# Altium PCB WF_AutoCar.PcbDoc (part 1 of 2)
Units mil, origin at the board's own origin, x right, y up, seen from the top; angles counter-clockwise.
Board outline 2600 x 3475 mil, 4 copper layers (Top Layer, InternalPlane1, POWER, Bottom Layer); 97 components, 133 nets, 458 pads, 431 vias.
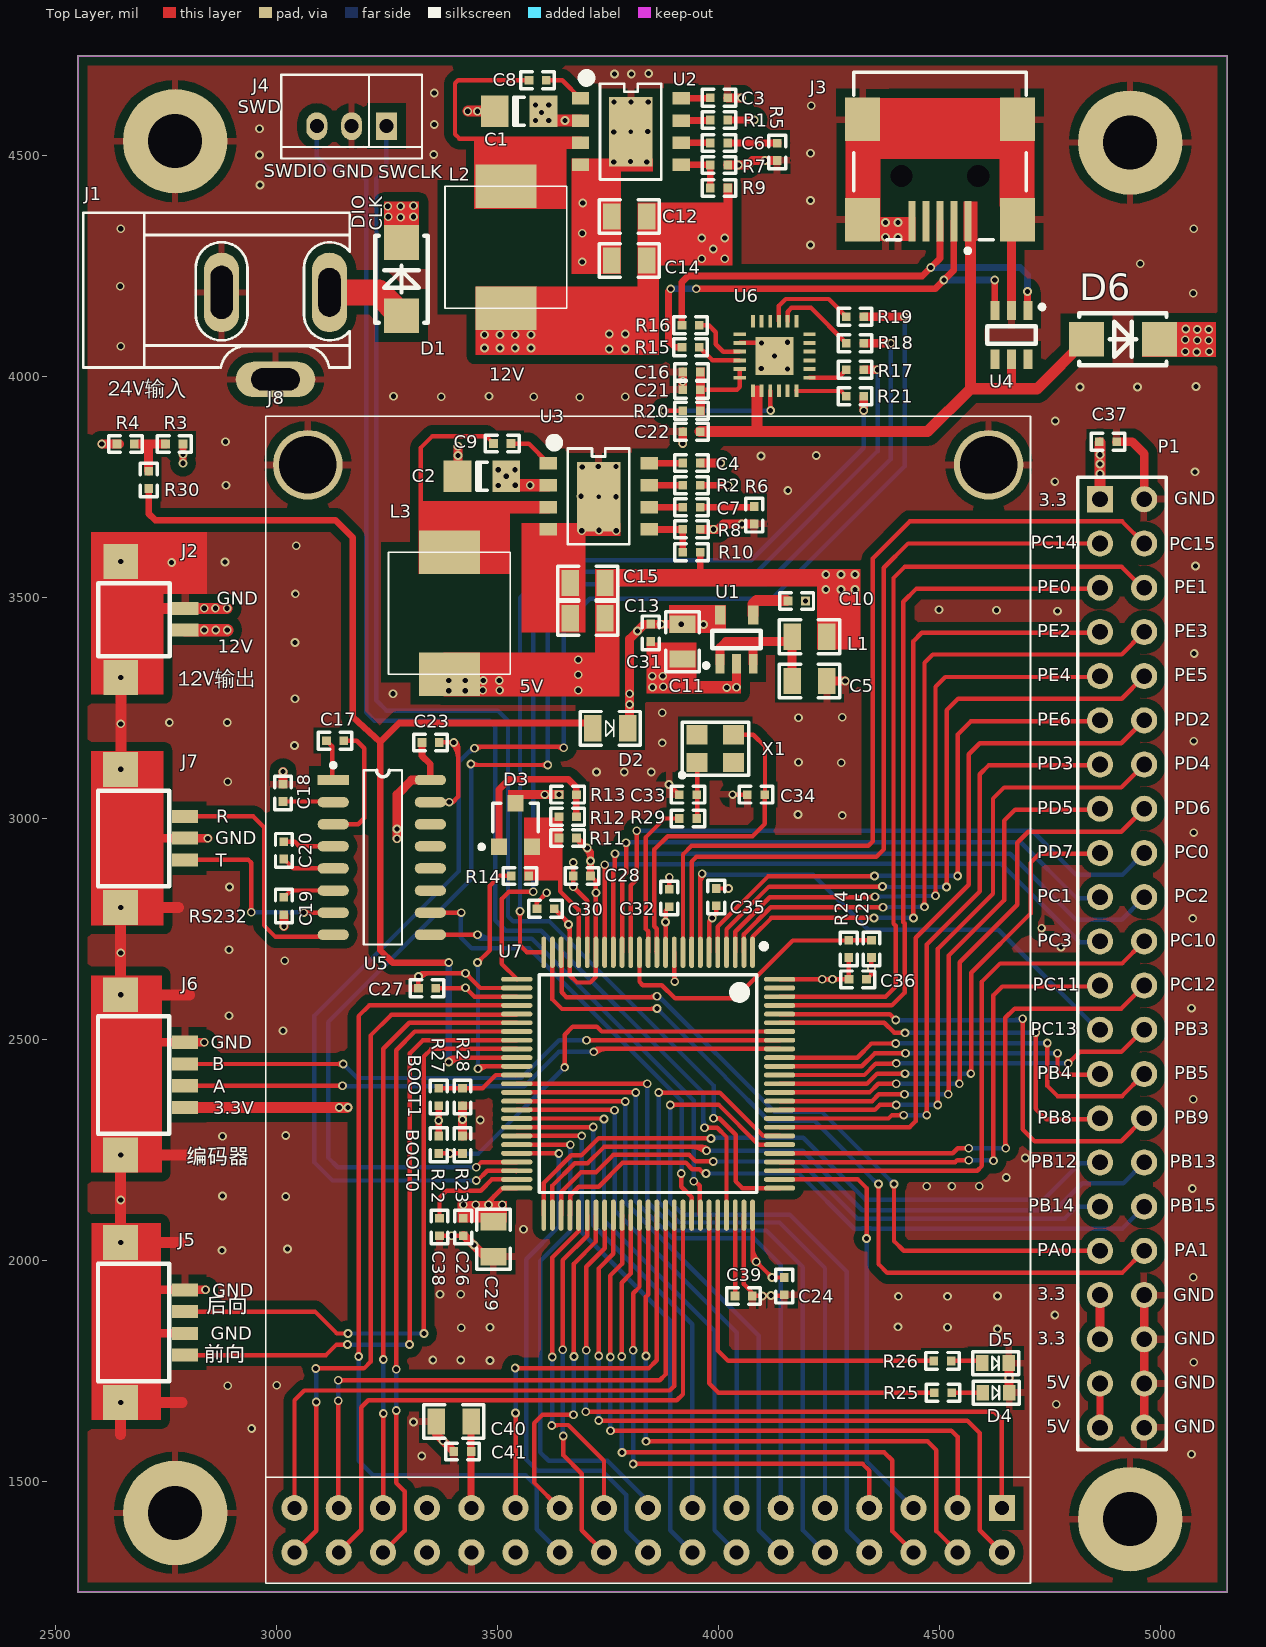
[diagram p0: Top Layer view]
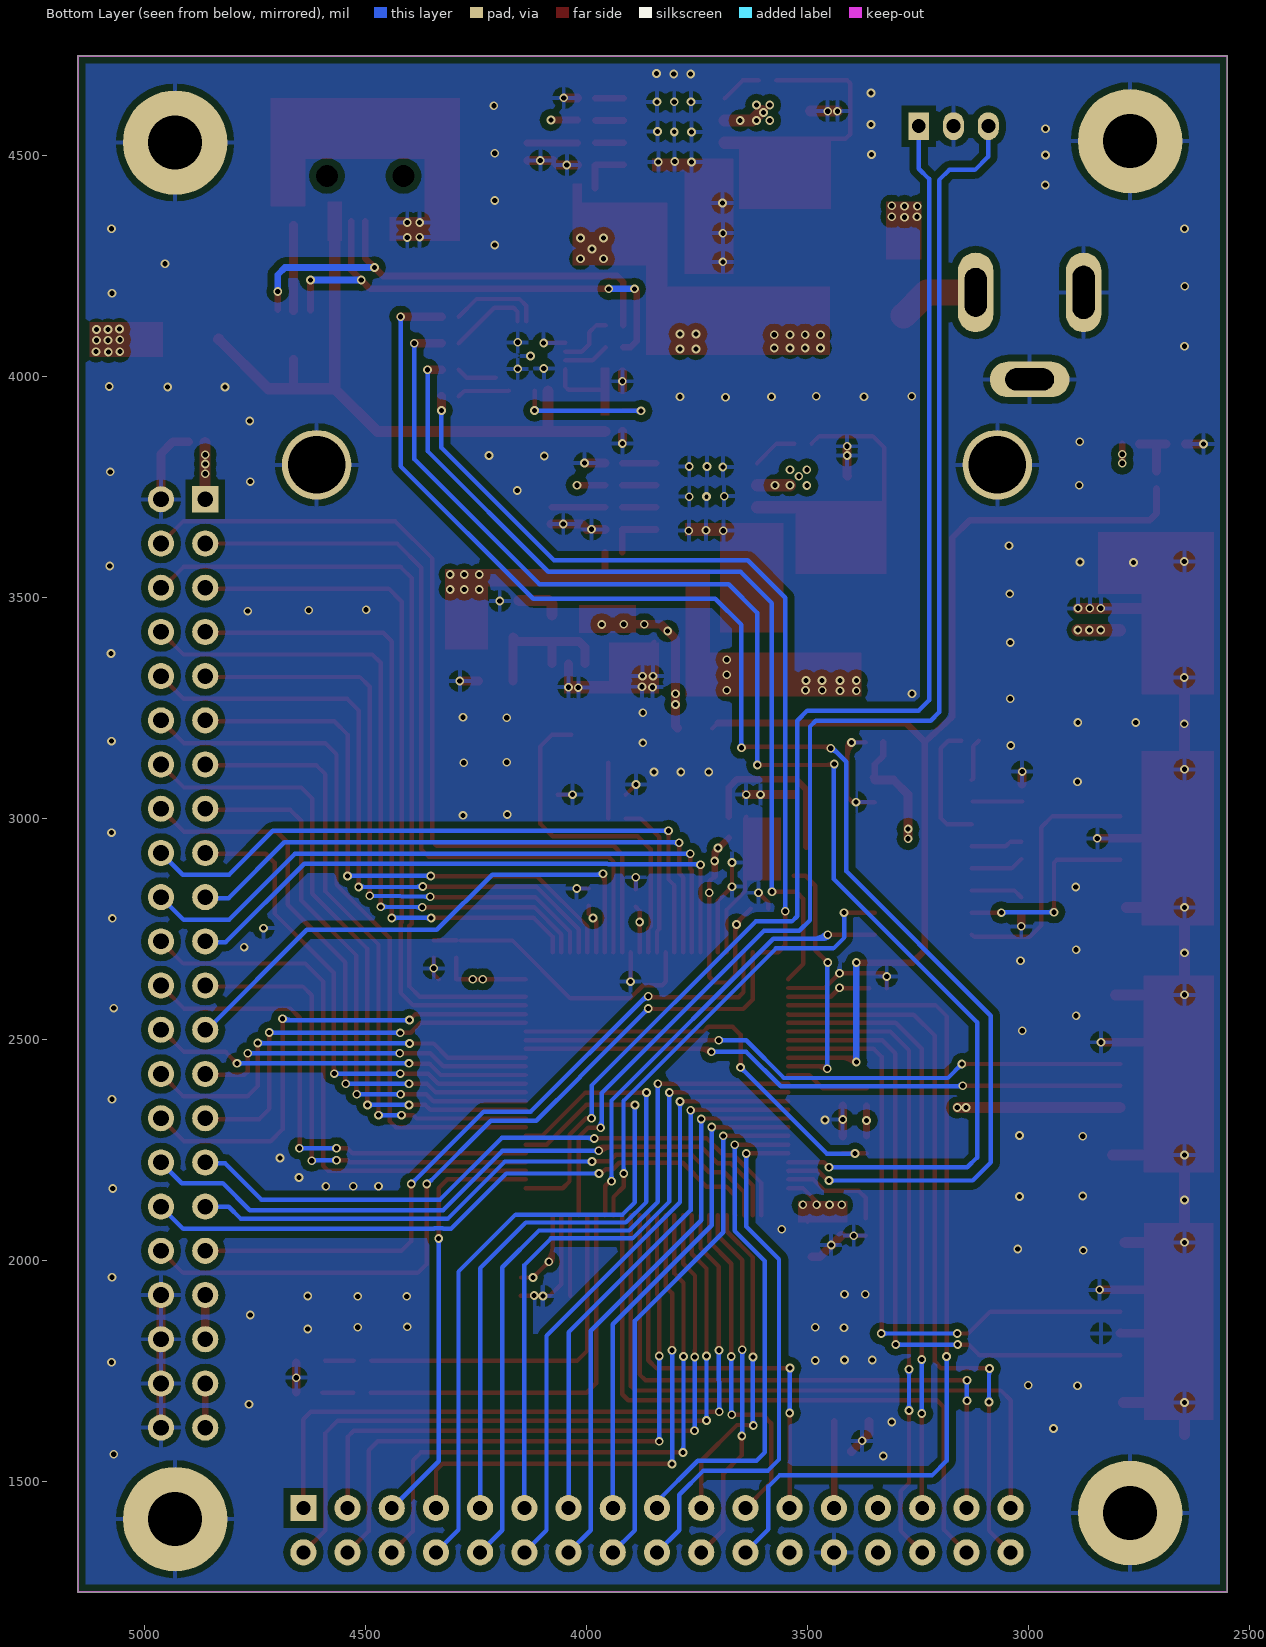
[diagram p1: Bottom Layer view, seen from below]
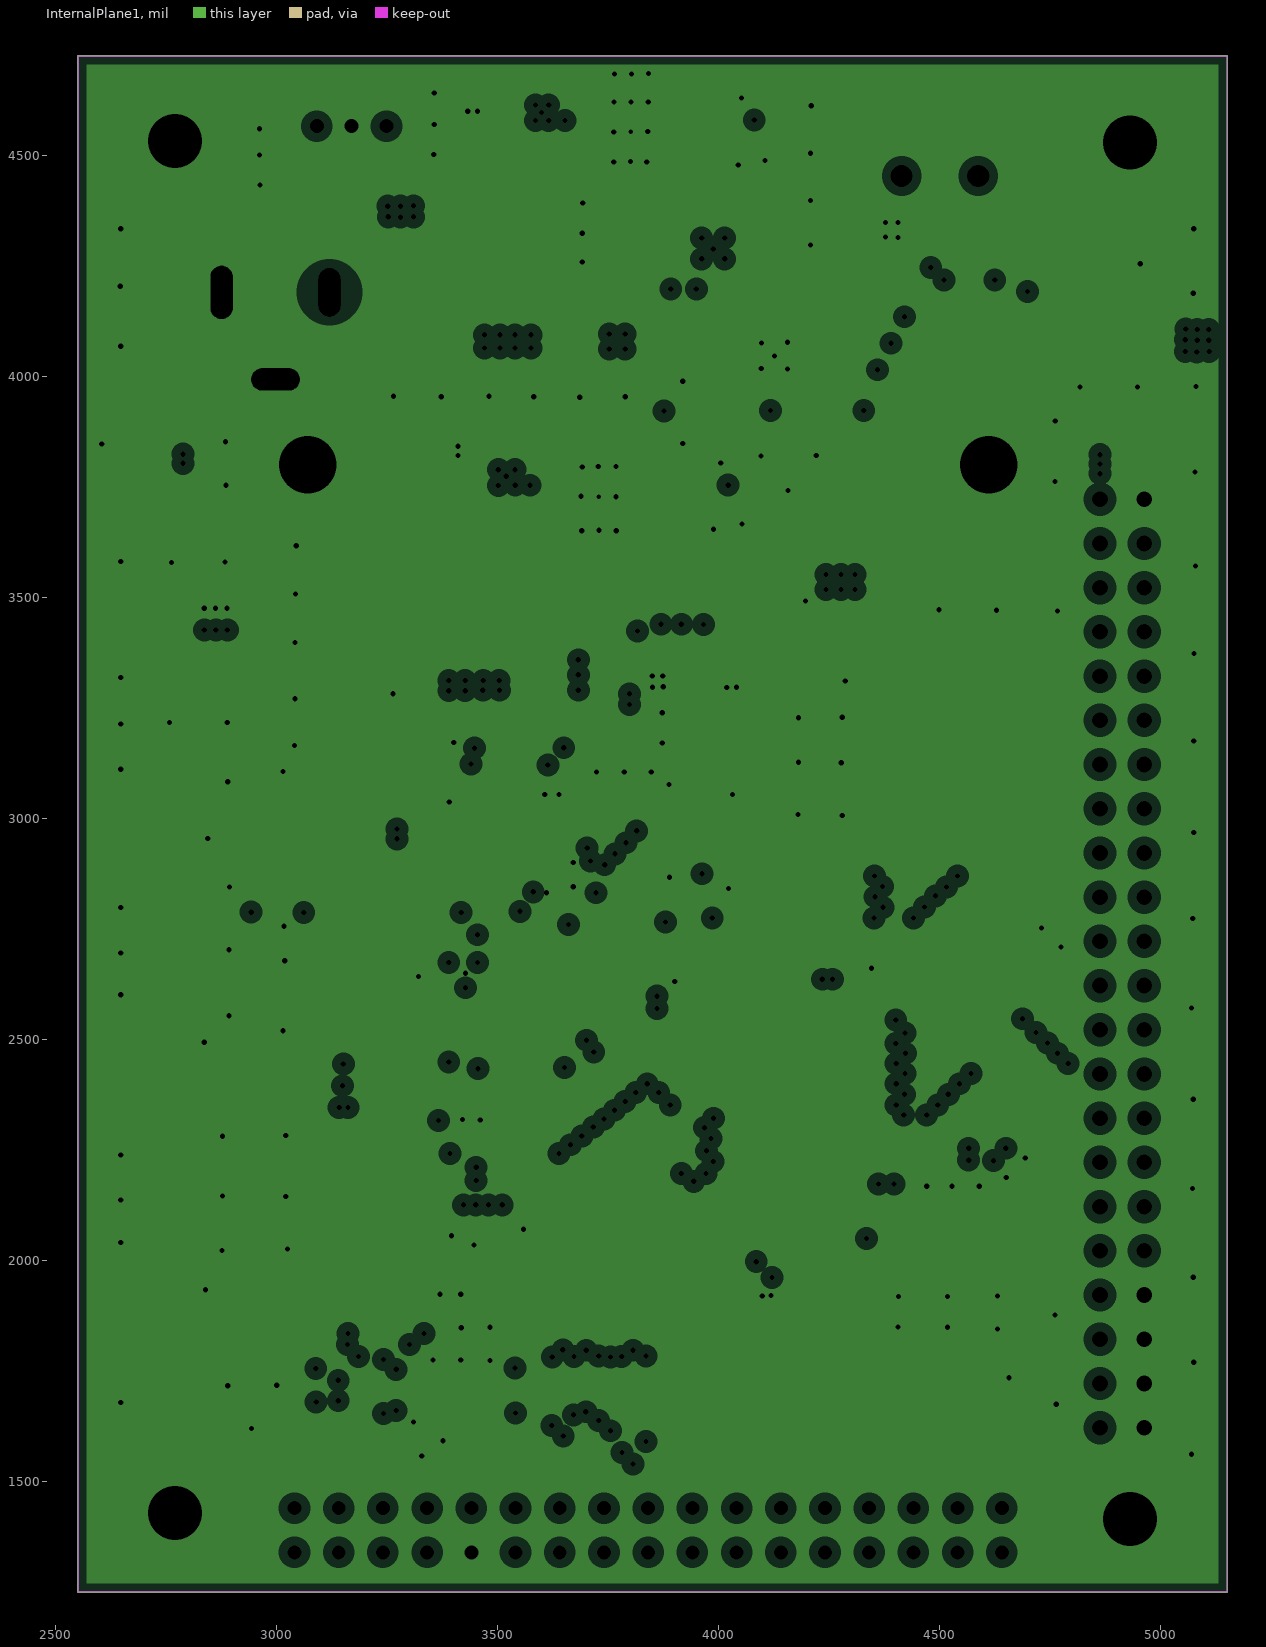
[diagram p2: InternalPlane1, clearances drawn from the general rule]
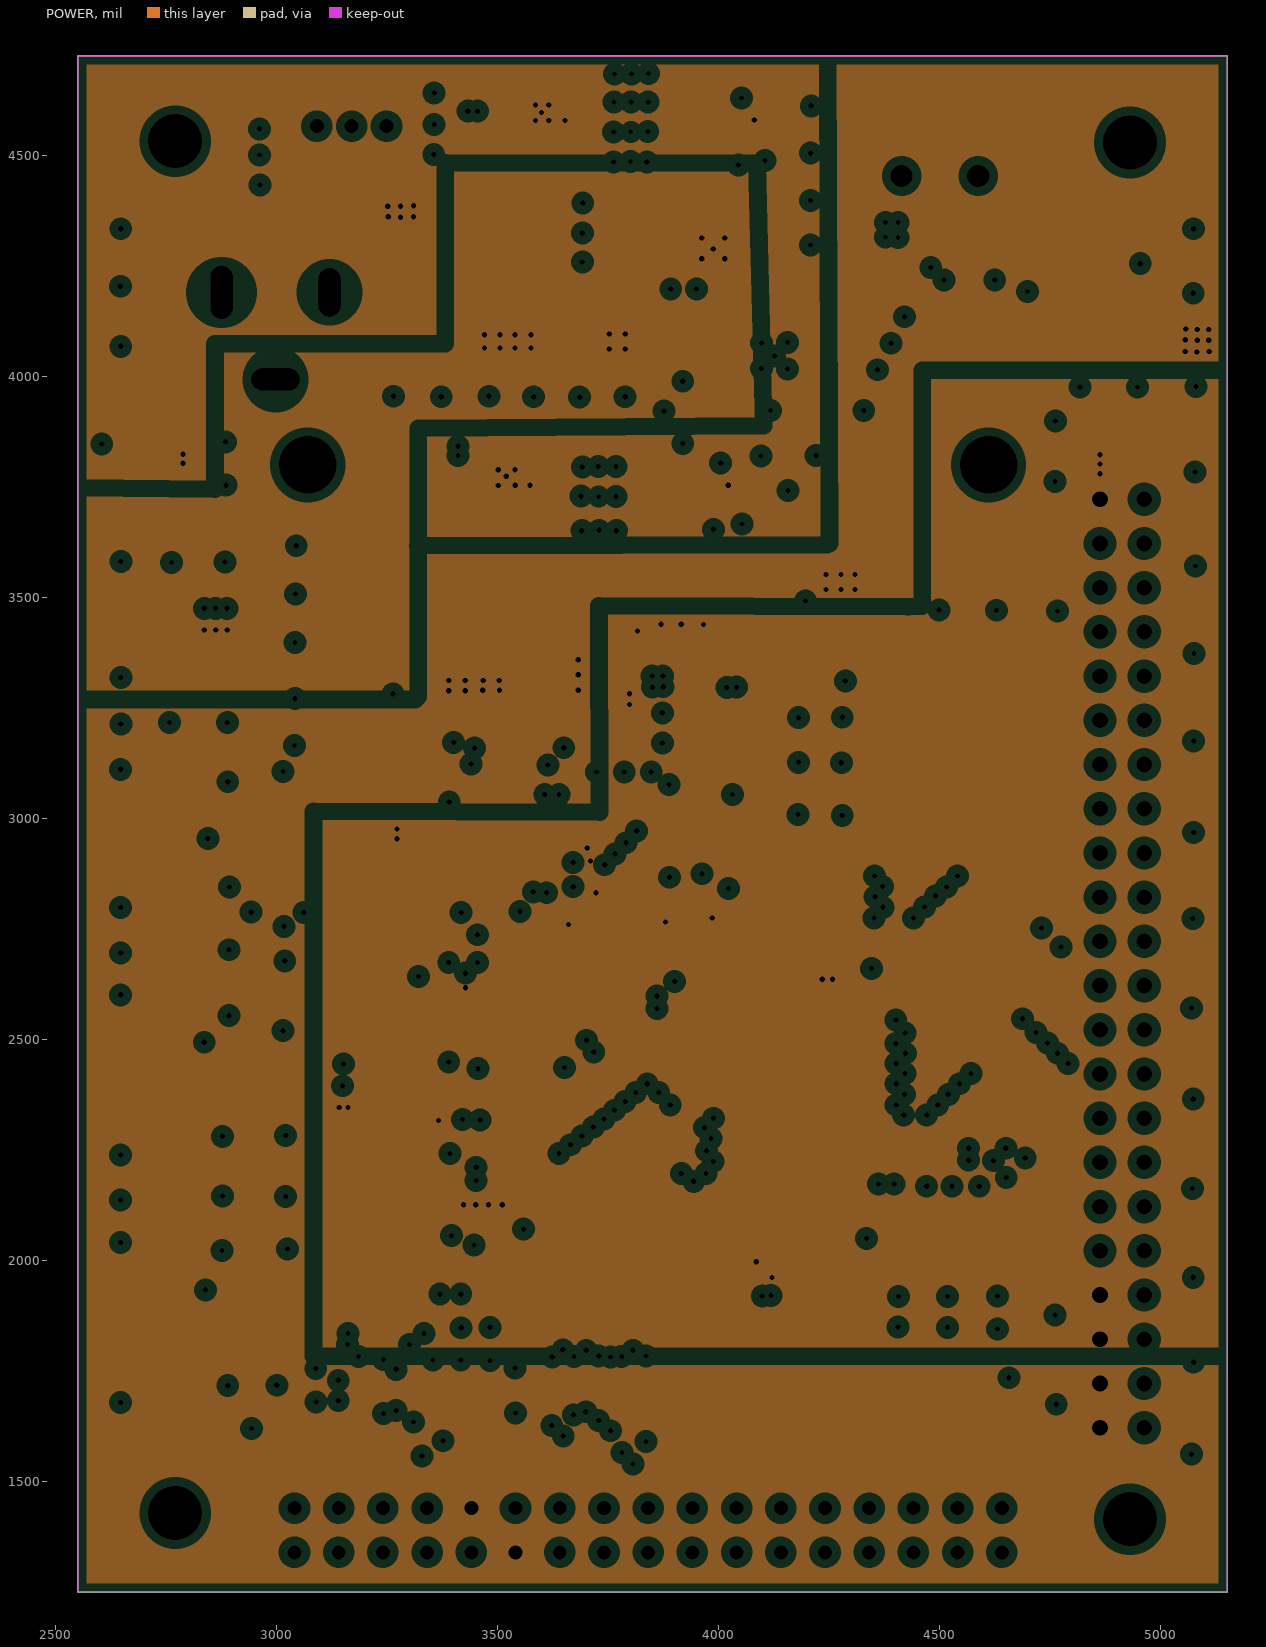
[diagram p3: POWER, clearances drawn from the general rule]

## Layer stack, top to bottom
Top Layer: signal copper 1.4
Dielectric: core 12.6, FR-4, Dk 4.8
InternalPlane1: plane copper 1.4, net GND
Dielectric: prepreg 12.6, FR-4, Dk 4.8
POWER: plane copper 1.4, net (Multiple Nets)
Dielectric: core 12.6, FR-4, Dk 4.8
Bottom Layer: signal copper 1.4

## Board outline
2550,1250 5150,1250 5150,4725 2550,4725

## Design rules (kind name [scope] priority, off if disabled: settings)
Clearance [All] p1: gap=10
PlaneClearance [All] p1: clearance=20
PlaneConnect [All] p1: planeconnectstyle=Relief reliefexpansion=20 reliefentries=4 reliefconductorwidth=15 reliefairgap=10
PolygonConnect [All] p1: connectstyle=Relief reliefconductorwidth=15 reliefentries=4 polygonreliefangle="90 Angle"
RoutingVias [All] p1: holewidth=28 width=50 viastyle="Through Hole" minholewidth=28 minwidth=50 maxholewidth=28 maxwidth=50
SilkscreenOverComponentPads [All] p1: minsilkscreentomaskgap=10
SolderMaskExpansion [All] p1: expansion=4
TestPointUsage [All] p1: valid=0 allowmultiple=FALSE
Testpoint [All] p1: side=15 testpointundercomponent=TRUE minsize=40 maxsize=100 preferedsize=60 minholesize=0 maxholesize=40 preferedholesize=32 testpointgrid=1 style=1023 order=0-112345678
Width [All] p1: maxlimit=100 minlimit=10 preferedwidth=10
21 further rules are at their usual default settings.

## Components (designator, comment, footprint, x,y, rotation, side; value= is the part's Value field where it differs from the comment)
C1 "Cap1" C1206 3548,4600 r0 top
C2 "Cap1" C1206 3464,3774 r0 top
C3 "Cap1" C0402 4000,4630 r180 top
C4 "Cap1" C0402 3938,3804 r180 top
C5 "Cap1" CC0805 4205,3311 r180 top
C6 "Cap1" C0402 4000,4528 r180 top
C7 "Cap1" C0402 3938,3704 r180 top
C8 "Cap1" C0402 3590,4670 r180 top
C9 "Cap1" C0402 3510,3848 r180 top
C10 "Cap1" C0402 4176,3492 r180 top
C11 "Cap1" CC0805 3918,3400 r90 top
C12 "Cap1" CC0805 3797,4362 r0 top
C13 "Cap1" CC0805 3703,3453 r0 top
C14 "Cap1" CC0805 3797,4262 r0 top
C15 "Cap1" CC0805 3703,3533 r0 top
C16 "Cap1" C0402 3938,4010 r0 top
C17 "Cap1" C0402 3132,3176 r0 top
C18 "Cap1" C0402 3014,3058 r270 top
C19 "Cap1" C0402 3016,2802 r90 top
C20 "Cap1" C0402 3016,2928 r270 top
C21 "Cap1" C0402 3938,3970 r0 top
C22 "Cap1" C0402 3938,3875 r0 top
C23 "Cap1" C0402 3348,3172 r0 top
C24 "Cap1" C0402 4148,1942 r90 top
C25 "Cap1" C0402 4345,2705 r90 top
C26 "Cap1" C0402 3422,2076 r90 top
C27 "Cap1" C0402 3340,2616 r0 top
C28 "Cap1" C0402 3690,2870 r0 top
C29 "Cap1" CC0805 3490,2048 r90 top
C30 "Cap1" C0402 3608,2796 r0 top
C31 "Cap1" C0402 3846,3420 r90 top
C32 "Cap1" C0402 3888,2820 r270 top
C33 "Cap1" C0402 3930,3054 r180 top
C34 "Cap1" C0402 4084,3054 r180 top
C35 "Cap1" C0402 3994,2822 r270 top
C36 "Cap1" C0402 4314,2636 r180 top
C37 "Cap1" C0402 4880,3852 r180 top
C38 "Cap1" C0402 3368,2076 r90 top
C39 "Cap1" C0402 4056,1920 r0 top
C40 "Cap1" CC0805 3400,1636 r0 top
C41 "Cap1" C0402 3420,1568 r0 top
D1 "SS34" LC-SMA(DO-214AC)_S2 3282,4220 r270 top
D2 "1N4148/0603" Diode-0805 3754,3204 r0 top
D3 "TL431" SOT-23 3540,2985 r0 top
D4 "LED0" DIODE-12 4627,1701 r0 top
D5 "LED1" DIODE-12 4626,1768 r0 top
D6 "M7" LC-SMA(DO-214AC)_S2 4914,4084 r180 top
J1 "DC-005" DC10B 2700,4020 r0 top
J2 "MH1.25*2卧式贴片" MH1.25*2立式表贴 2720,3500 r270 top
J3 "USB-PORT" USB/SM0.8-6H5 4500,4660 r90 top
J4 "2.0*3" Con3_2.0 3248,4566 r180 top
J5 "MH1.25*4卧式 前向开关 后向开关" MH1.25*4立式表贴 2719.57,1860 r270 top
J6 "MH1.25*4卧式 编码器接口" MH1.25*4立式表贴 2719.57,2420 r270 top
J7 "MH1.25*3卧式贴片 RS232" MH1.25*3立式表贴 2719.57,2980 r270 top
J8 "LCD2.2" 2.2TFT_ILI9325 4640,1440 r0 top
L1 "BLM18" CC0805 4205,3411 r180 top
L2 "Inductor" 0630 3656,4430 r270 top
L3 "Inductor" 0630 3528,3602 r270 top
P1 "Header 22X2" HDR2X22 4862,3722 r270 top
R1 "Res1" C0402 4000,4580 r0 top
R2 "Res1" C0402 3938,3754 r0 top
R3 "Res1" C0402 2768,3847 r0 top
R4 "Res1" C0402 2658,3847 r0 top
R5 "Res1" C0402 4132,4508 r270 top
R6 "Res1" C0402 4080,3686 r270 top
R7 "Res1" C0402 4000,4478 r180 top
R8 "Res1" C0402 3938,3654 r180 top
R9 "Res1" C0402 4000,4426 r0 top
R10 "Res1" C0402 3938,3602 r0 top
R11 "Res1" C0402 3658,2956 r0 top
R12 "Res1" C0402 3658,3004 r0 top
R13 "Res1" C0402 3658,3054 r180 top
R14 "Res1" C0402 3550,2870 r0 top
R15 "Res1" C0402 3936,4066 r0 top
R16 "Res1" C0402 3936,4116 r0 top
R17 "Res1" C0402 4308,4015 r0 top
R18 "Res1" C0402 4308,4075 r0 top
R19 "Res1" C0402 4308,4135 r0 top
R20 "Res1" C0402 3938,3922 r0 top
R21 "Res1" C0402 4308,3955 r0 top
R22 "Res1" C0402 3366,2262 r90 top
R23 "Res1" C0402 3420,2262 r270 top
R24 "Res1" C0402 4294,2705 r90 top
R25 "Res1" C0402 4507,1701 r0 top
R26 "Res1" C0402 4506,1773 r0 top
R27 "Res1" C0402 3366,2370 r270 top
R28 "Res1" C0402 3420,2370 r90 top
R29 "Res1" C0402 3930,3000 r0 top
R30 "Res1" C0402 2710,3766 r270 top
U1 "SP6205EM5-L-3-3" LC-SOT-23-5 4040,3405 r270 top
U2 "MP2303" LC-SOIC-8_150mil 3801,4553 r0 top
U3 "MP2303" LC-SOIC-8_150mil 3728,3728 r0 top
U4 "SRV05-4.TCT" LC-SOT-23-6 4662,4094 r90 top
U5 "MAX3232" SOP16M 3240,2917 r270 top
U6 "CP2105" QFN-24 4063,4115 r0 top
U7 "STM32F207VET6" LC-LQFP-100_14x14x05P 3840,2400 r180 top
X1 "12M" XTAL-3225 3992,3158 r180 top

## Footprints (in the part's own frame and the unit in brackets; to place one, negate y for a bottom-side part, rotate by r counter-clockwise, add the part's x,y. Pads: shape width x height; smd on the part's side, far side on the other; paste and mask are expansions set on the pad)
2.2TFT_ILI9325 [mm]
  rect 1.5x1.5 hole 0.8: 1(0,0)
  round 1.5 hole 0.8: 2(0,-2.54) 3(-2.54,0) 4(-2.54,-2.54) 5(-5.08,0) 6(-5.08,-2.54) 7(-7.62,0) 8(-7.62,-2.54) 9(-10.16,0) 10(-10.16,-2.54) 11(-12.7,0) 12(-12.7,-2.54) 13(-15.24,0) 14(-15.24,-2.54) 15(-17.78,0) 16(-17.78,-2.54) 17(-20.32,0) 18(-20.32,-2.54) 19(-22.86,0) 20(-22.86,-2.54) 21(-25.4,0) 22(-25.4,-2.54) 23(-27.94,0) 24(-27.94,-2.54) 25(-30.48,0) 26(-30.48,-2.54) 27(-33.02,0) 28(-33.02,-2.54) 29(-35.56,0) 30(-35.56,-2.54) 31(-38.1,0) 32(-38.1,-2.54) 33(-40.64,0) 34(-40.64,-2.54)
  round 4 hole 3.3: 35(-39.878,59.944) 36(-0.762,59.944)
  silkscreen extent -42.29,-4.32 1.65,62.74
0630 [mm] "7*7*3mm"
  rect 2.5x3.5 smd: 1(0,-3.5) 2(7,-3.5)
  silkscreen extent 0,-7 7,0
C0402 [mm]
  rect 0.5x0.5 smd: 1(-0.5,0) 2(0.5,0)
  silkscreen extent -0.97,-0.48 0.97,0.48, body extent -0.74,-0.25 0.74,0.25, height 0.5
C1206 [mm] "Chip Capacitor; Body 3.2 x 1.6 mm (LxW typ)"
  rect 1.6x1.8 smd: 1(-1.4,0) 2(1.4,0)
  silkscreen extent -0.3,-0.8 0.3,0.8
CC0805 [mm]
  rect 1x1.5 smd: 1(-1,0) 2(1,0)
  silkscreen extent -1.73,-0.97 1.73,0.97, body extent -1.37,-0.79 1.37,0.79, height 1.25
Con3_2.0 [mm]
  rect 1.2x1.6 hole 0.8: 1(0,0)
  oval 1.2x1.6 hole 0.8: 2(2,0) 3(4,0)
  silkscreen extent -2.05,-2.95 6.05,1.85, body extent -2.05,-2.95 6.05,1.85, height 6
DC10B [mil]
  oval 80x180 hole 50 slot 110 at 90 deg: 1(419.09,170)
  oval 80x180 hole 50 slot 120 at 90 deg: 2(175,170)
  oval 180x80 hole 50 slot 110 at 0 deg: 3(297.05,-26.85)
  silkscreen extent -138,0 465,350
DIODE-12 [mil]
  rect 28.04x36 smd: 1(-30,0)
  rect 28.03x36 smd: 2(30,0)
  silkscreen extent -52,-26 52,26, body extent -44,-18 44,18, height 30
Diode-0805 [mm]
  rect 1x1.5 smd: 1(-1,0) 2(1,0)
  silkscreen extent -1.73,-0.97 1.73,0.97, body extent -1.37,-0.79 1.37,0.79, height 1.25
HDR2X22 [mm] "Connector; Header; 22x2 Position"
  rect 1.5x1.5 hole 0.9: 1(0,0)
  round 1.5 hole 0.9: 2(0,2.54) 3(2.54,0) 4(2.54,2.54) 5(5.08,0) 6(5.08,2.54) 7(7.62,0) 8(7.62,2.54) 9(10.16,0) 10(10.16,2.54) 11(12.7,0) 12(12.7,2.54) 13(15.24,0) 14(15.24,2.54) 15(17.78,0) 16(17.78,2.54) 17(20.32,0) 18(20.32,2.54) 19(22.86,0) 20(22.86,2.54) 21(25.4,0) 22(25.4,2.54) 23(27.94,0) 24(27.94,2.54) 25(30.48,0) 26(30.48,2.54) 27(33.02,0) 28(33.02,2.54) 29(35.56,0) 30(35.56,2.54) 31(38.1,0) 32(38.1,2.54) 33(40.64,0) 34(40.64,2.54) 35(43.18,0) 36(43.18,2.54) 37(45.72,0) 38(45.72,2.54) 39(48.26,0) 40(48.26,2.54) 41(50.8,0) 42(50.8,2.54) 43(53.34,0) 44(53.34,2.54)
  silkscreen extent -1.27,-1.27 54.61,3.81
LC-LQFP-100_14x14x05P [mm]
  oval 0.28x1.8 smd mask+0.051: 1(-6,-7.55) 2(-5.5,-7.55) 3(-5,-7.55) 4(-4.5,-7.55) 5(-4,-7.55) 6(-3.5,-7.55) 7(-3,-7.55) 8(-2.5,-7.55) 9(-2,-7.55) 10(-1.5,-7.55) 11(-1,-7.55) 12(-0.5,-7.55) 13(0,-7.55) 14(0.5,-7.55) 15(1,-7.55) 16(1.5,-7.55) 17(2,-7.55) 18(2.5,-7.55) 19(3,-7.55) 20(3.5,-7.55) 21(4,-7.55) 22(4.5,-7.55) 23(5,-7.55) 24(5.5,-7.55) 25(6,-7.55) 51(6,7.55) 52(5.5,7.55) 53(5,7.55) 54(4.5,7.55) 55(4,7.55) 56(3.5,7.55) 57(3,7.55) 58(2.5,7.55) 59(2,7.55) 60(1.5,7.55) 61(1,7.55) 62(0.5,7.55) 63(0,7.55) 64(-0.5,7.55) 65(-1,7.55) 66(-1.5,7.55) 67(-2,7.55) 68(-2.5,7.55) 69(-3,7.55) 70(-3.5,7.55) 71(-4,7.55) 72(-4.5,7.55) 73(-5,7.55) 74(-5.5,7.55) 75(-6,7.55)
  oval 1.8x0.28 smd mask+0.051: 26(7.55,-6) 27(7.55,-5.5) 28(7.55,-5) 29(7.55,-4.5) 30(7.55,-4) 31(7.55,-3.5) 32(7.55,-3) 33(7.55,-2.5) 34(7.55,-2) 35(7.55,-1.5) 36(7.55,-1) 37(7.55,-0.5) 38(7.55,0) 39(7.55,0.5) 40(7.55,1) 41(7.55,1.5) 42(7.55,2) 43(7.55,2.5) 44(7.55,3) 45(7.55,3.5) 46(7.55,4) 47(7.55,4.5) 48(7.55,5) 49(7.55,5.5) 50(7.55,6) 76(-7.55,6) 77(-7.55,5.5) 78(-7.55,5) 79(-7.55,4.5) 80(-7.55,4) 81(-7.55,3.5) 82(-7.55,3) 83(-7.55,2.5) 84(-7.55,2) 85(-7.55,1.5) 86(-7.55,1) 87(-7.55,0.5) 88(-7.55,0) 89(-7.55,-0.5) 90(-7.55,-1) 91(-7.55,-1.5) 92(-7.55,-2) 93(-7.55,-2.5) 94(-7.55,-3) 95(-7.55,-3.5) 96(-7.55,-4) 97(-7.55,-4.5) 98(-7.55,-5) 99(-7.55,-5.5) 100(-7.55,-6)
  silkscreen extent -6.8,-8.05 6.25,6.25
LC-SMA(DO-214AC)_S2 [mm]
  rect 2x2 smd: 1(2.1,0) 2(-2.1,0)
  silkscreen extent -2.5,-1.5 2.5,1.5
LC-SOIC-8_150mil [mm]
  rect 1x0.72 smd: 1(-2.898,1.925) 2(-2.898,0.655) 3(-2.898,-0.615) 4(-2.898,-1.885) 5(2.902,-1.885) 6(2.902,-0.615) 7(2.902,0.655) 8(2.902,1.925)
  rect 2.5x4 smd: 9(0,0)
  silkscreen extent -2.81,-2.73 1.75,3.35, body extent -1.9,-2.5 2.1,2.5, height 1.73
LC-SOT-23-5 [mm]
  rect 1.1x0.5 smd: 1(1.4,-0.95) 2(1.4,0) 3(1.4,0.95)
  rect 1.1x0.6 smd: 4(-1.4,0.95) 5(-1.4,-0.95)
  silkscreen extent -0.5,-1.87 1.62,1.4
LC-SOT-23-6 [mm]
  rect 1.1x0.5 smd: 1(1.4,-0.95) 2(1.4,0) 3(1.4,0.95) 4(-1.4,0.95) 5(-1.4,0) 6(-1.4,-0.95)
  silkscreen extent -0.5,-1.87 1.72,1.4
MH1.25*2立式表贴 [mm]
  rect 0.75x1.5 smd: 1(1.875,1.85) 2(0.625,1.85)
  rect 2x2 smd: 3(-2.06,-1.85) 4(4.6,-1.85)
  silkscreen extent -0.81,-3.15 3.37,0.95, body extent -0.81,-3.86 3.37,1.85, height 3
MH1.25*3立式表贴 [mm]
  rect 0.75x1.5 smd: 1(1.875,1.85) 2(0.625,1.85) 3(-0.625,1.85)
  rect 2x2 smd: 4(-3.33,-1.85) 5(4.6,-1.85)
  silkscreen extent -2.11,-3.15 3.37,0.95, body extent -1.98,-3.89 3.37,1.85, height 3
MH1.25*4立式表贴 [mm]
  rect 0.75x1.5 smd: 1(1.875,1.85) 2(0.625,1.85) 3(-0.625,1.85) 4(-1.875,1.85)
  rect 2x2 smd: 5(-4.6,-1.85) 6(4.6,-1.85)
  silkscreen extent -3.37,-3.15 3.37,0.95, body extent -3.37,-3.85 3.37,1.85, height 3
QFN-24 [mm]
  rect 0.7x0.22 smd: 1(-0.4,-0.5) 2(-0.4,-1) 3(-0.4,-1.5) 4(-0.4,-2) 5(-0.4,-2.5) 6(-0.4,-3) 13(3.6,-3) 14(3.6,-2.5) 15(3.6,-2) 16(3.6,-1.5) 17(3.6,-1) 18(3.6,-0.5)
  round 0.4 on Top Overlay: 1(-0.375,0.025)
  rect 0.22x0.7 smd: 7(0.35,-3.75) 8(0.85,-3.75) 9(1.35,-3.75) 10(1.85,-3.75) 11(2.35,-3.75) 12(2.85,-3.75) 19(2.85,0.25) 20(2.35,0.25) 21(1.85,0.25) 22(1.35,0.25) 23(0.85,0.25) 24(0.35,0.25)
  rect 2.2x2.2 smd: 25(1.6,-1.75)
SOP16M [mm]
  rect 0.6x1.8 smd: 1(-4.318,-2.854)
  oval 0.6x1.8 smd: 2(-3.048,-2.854) 3(-1.778,-2.854) 4(-0.508,-2.854) 5(0.762,-2.854) 6(2.032,-2.854) 7(3.302,-2.854) 8(4.572,-2.854) 9(4.572,2.727) 10(3.302,2.727) 11(2.032,2.727) 12(0.762,2.727) 13(-0.508,2.727) 14(-1.778,2.727) 15(-3.048,2.727) 16(-4.318,2.727)
  silkscreen extent -5.29,-2.98 5.13,1.1
SOT-23 [mm] "SOT-23; 3 Leads; Body 3.0 x 2.6 mm, inc. leads (LxW max)"
  rect 0.9x0.95 smd: 1(-0.95,-1.25) 2(0.95,-1.25) 3(0,1.25)
  silkscreen extent -2.07,-1.37 1.3,1.25
USB/SM0.8-6H5 [mm]
  rect 2.3x0.4 smd: 1(-7.85,-1.6) 2(-7.85,-0.8) 3(-7.85,0) 4(-7.85,0.8) 5(-7.85,1.6)
  rect 2.5x2 smd: 6(-7.75,4.45) 7(-1.996,4.45) 8(-7.75,-4.45) 9(-1.996,-4.45)
  round 0.6 hole 1.27 unplated: MH1(-5.25,2.2) MH2(-5.25,-2.2)
  silkscreen extent -9.67,-4.95 0.7,4.95
XTAL-3225 [mm]
  rect 1.2x1.1 smd: 1(1.05,0.8) 2(-1.05,-0.8) 3(-1.05,0.8) 4(1.05,-0.8)
  silkscreen extent -1.91,-1.52 2.03,1.65, body extent -1.52,-1.27 1.52,1.27, height 1.2

## Part data
C1 C2 C3 C4 C5 C6 C7 C8 C9 C10 C11 C12 C13 C14 C15 C16 C17 C18 C19 C20 C21 C22 C23 C24 C25 C26 C27 C28 C29 C30 C31 C32 C33 C34 C35 C36 C37 C38 C39 C40 C41: "Capacitor"
D1 D2 D6: library part Diode1
D3: library part TL431-SOT23
D4: library part LED1, "Typical INFRARED GaAs LED"
D5: "Typical INFRARED GaAs LED"
J4: library part Con3_2.0, "Header, 3-Pin"
J5 J6: library part MH1.25*4立式贴片
J7: library part MH1.25*3卧式贴片
J8: library part "2.2 LCD ILI9325"
P1: "Header, 22-Pin, Dual row"
R1 R2 R3 R4 R5 R6 R7 R8 R9 R10 R11 R12 R13 R14 R15 R16 R17 R18 R19 R20 R21 R22 R23 R24 R25 R26 R27 R28 R29 R30: "Resistor"
U2 U3: library part MP2307
X1: library part XTAL_1, "Crystal Oscillator"

## Free pads (board coordinates)
  round 236.22 hole 122.05: 0(4930,4529) 1(2770,4532) 2(2770,1429) 3(4930,1415)

## Via types
v1: diameter 19.68, hole 11.81, Top Layer to Bottom Layer, tented both sides, 429 vias
v2: diameter 20, hole 10, Top Layer to Bottom Layer, 2 vias

## Nets (pads, with @x,y where several pads share a name; then routed paths per layer and width w, separated by ;. In a path a pad name is that pad's centre, name@x,y a point inside that pad or via, vN(x,y) a via of type N, cw(c..) or ccw(c..) an arc to the next point about the centre after c; other vN are vias at no path point)
3.3V: C11.2 C23.1 C24.2 C26.2 C27.2 C28.2 C29.2 C30.2 C31.2 C32.2 C35.2 C36.2 C37.2 D2.2 J6.1 P1.1 P1.37 P1.39 R11.2 R22.2 R24.1 R27.2 U1.5 U5.16 U7.6 U7.11 U7.19 U7.22 U7.28 U7.50 U7.75 U7.100 | length 3134.6
  Top Layer w10: U5.16@3347.36,3087 U5.16@3354,3093.64 ; C27.2@3359.68,2616 3428,2616 3447.15,2596.85 U7.28@3542.76,2596.85 ; 3412.89,2616 ccw(c3412.89,2631.11) v1@3423.58,2620.42 ; C26.2@3422,2095.68 C26.2@3425.68,2095.68 ; 3464.39,2130.04 ccw(c3473.89,2127.42) 3466.92,2120.45 ; v1@3474.03,2127.38 ccw(c3492.89,2122.16) 3479.05,2108.32 ; v1@3483.67,2124.71 ccw(c3511.89,2116.9) C29.2@3491.18,2096.19 ; v1@3483.84,2126 cw(c3512.43,2126) 3492.22,2146.22 ; C29.2@3500,2087.37 3466.68,2120.68 3509.78,2163.78 U7.50@3542.76,2163.78 ; C30.2@3627.68,2796 3662.83,2760.85 U7.22@3662.83,2697.24 3662.83,2645.17 3679,2629 3709,2629 3721.89,2641.89 U7.19@3721.89,2697.24 3721.89,2857.8 C28.2@3709.68,2870 ; 3649.13,2774.56 cw(c3634.57,2760) v1@3655.16,2760 ; v1@3656.58,2756.58 cw(c3641.47,2741.47) 3662.83,2741.47 ; v1@3875.95,2762.58 cw(c3867.68,2754.31) 3879.37,2754.31 cw(c3891.06,2754.31) v1@3882.79,2762.58 ; U7.11@3879.37,2697.24 3879.37,2791.69 C32.2@3888,2800.32 ; U7.6@3977.8,2697.24 3977.8,2767.8 3994,2784 C35.2@3994,2802.32 ; 4076.22,2005.16 ccw(c4092.32,2005.16) v1@4080.94,1993.77 ; 4076.22,2029.3 ccw(c4116.46,2029.3) v1@4088.01,2000.84 ; U7.75@4076.22,2102.76 4076.22,2005.78 v1(4120.31,1961.68) C24.2@4147,1961.68 ; v1@4084.58,1992.57 cw(c4084.58,1980.88) 4092.85,1989.15 cw(c4101.12,1997.42) v1@4089.43,1997.42 ; v1@4115.47,1961.68 ccw(c4103.78,1961.68) 4112.05,1969.95 ccw(c4120.31,1978.22) v1@4120.31,1966.53 ; U7.100@4137.24,2636.22 C36.2@4294.09,2636.22 ; v1@4230.58,2632.8 ccw(c4222.31,2624.53) 4222.31,2636.22 ccw(c4222.31,2647.91) v1@4230.58,2639.64 ; v1@4237.42,2632.8 cw(c4245.69,2624.53) 4245.69,2636.22 cw(c4245.69,2647.91) v1@4237.42,2639.64 ; v1@4253.58,2632.8 ccw(c4245.31,2624.53) 4245.31,2636.22 ccw(c4245.31,2647.91) v1@4253.58,2639.64 ; v1@4260.42,2632.8 cw(c4268.69,2624.53) 4268.69,2636.22 cw(c4268.69,2647.91) v1@4260.42,2639.64 ; C36.2@4294,2636.32 R24.1@4294,2685.32
  Top Layer w15: C23.1@3328.32,3172 3328.32,3141.68 3347.36,3122.64 U5.16@3347.36,3087 ; R22.2@3366,2281.68 R27.2@3366,2350.32 ; R11.2@3677.68,2956 3709.68,2924 C28.2@3709.68,2870 ; v1@3700.34,2931.34 cw(c3677.79,2908.79) v1@3709.68,2908.79
  Top Layer w20: v1(3272,2954) 3272,3054 3305,3087 U5.16@3347.36,3087 ; D2.2@3793.37,3204 3798,3208.63 3798,3406 3831.37,3439.37 C11.2@3918,3439.37 ; P1.39@4862,1822 P1.37@4862,1922
  Top Layer w25: J6.1@2792.41,2346.18 v1@3159,2346.18 ; P1.1@4862,3722 v1(4862,3780) v1(4862,3802) v1(4862,3823) C37.2@4862,3850.32
  other v1: 4084.58,1997.42 3422,2126 3450,2126 3479,2126 3510,2126 3366,2317 3141,2346.18 3161,2346 3427,2617 4234,2636.22 4257,2636.22 3660,2760 3879.37,2766 3984.86,2774.86 3721.89,2832 3709.68,2904 3702,2933 3272,2976 3798,3258 3798,3282 3815.98,3423.98 3869,3439.37 3915,3439.37 3965,3439
5V: C13.2 C15.2 C40.2 C41.2 D6.2 J8.24 J8.25 L1.1 L3.2 P1.41 P1.43 R10.2 | length 1145.9
  Top Layer w15: C40.2@3439.37,1636 3439.37,1440.63 J8.25@3440,1440 ; C15.2@3742.37,3533 3943,3533 3957.68,3547.68 R10.2@3957.68,3602 ; P1.43@4862,1622 P1.41@4862,1722
  Top Layer w28: L3.2@3446.2,3326.41 3706.41,3326.41 3742.37,3362.37 C13.2@3742.37,3453 C15.2@3742.37,3533 ; v1@3464.06,3314.94 cw(c3491.75,3287.25) 3491.75,3326.41 ; 3478.25,3326.41 cw(c3478.25,3287.25) v1@3505.94,3314.94 ; v1@3500.06,3314.94 cw(c3527.75,3287.25) 3527.75,3326.41
  other v1: 3389,3289 3426,3289 3466,3290 3504,3290 3682,3290 3389,3312 3426,3312 3467,3312 3503,3312 3682,3325 3682,3359 4242,3518 4276,3518 4308,3518 4242,3552 4276,3552 4308,3552 5081,4055 5055,4056 5109,4056 5082,4082 5108,4082 5055,4083 5082,4106 5108,4106 5056,4107
12V: C12.2 C14.2 J2.1 L2.2 R9.2 | length 95.2
  Top Layer w28: J2.1@2792.83,3426.18 v1(2888,3426.18)
  other v1: 2836,3426.18 2862,3426.18 3752,4062 3788,4062 3470,4064 3505,4064 3539,4064 3575,4064 3470,4094 3505,4094 3539,4094 3575,4094 3752,4096 3788,4096 3961,4266 4013,4266 3987,4288 3961,4313 4013,4313
24V: C1.2 C2.2 D1.2 R1.2 R2.2 R3.2 U2.2 U3.2 | length 334.4
  Top Layer w15: v1(2787.68,3803.32) R3.2@2787.68,3847 ; R2.2@3957.68,3754 v1(4021,3754) ; R1.2@4019.68,4580 v1(4080,4580)
  Top Layer w28: v1(3539.33,3753.78) U3.2@3613.9,3753.78 ; C1.2@3603.12,4600 3624.33,4578.78 U2.2@3686.9,4578.78
  other v1: 3501,3753 3573,3753.78 3519.12,3774 3501,3789 3539,3789 2787.68,3824 3280,4360 3252,4361 3309,4361 3251,4385 3280,4385 3309,4386 3585,4579 3615,4579 3652,4578.78 3599,4597 3585,4614 3615,4614
ADC8: D2.1 R30.2 U7.35 | length 2607.6
  Top Layer w10: v1@3385.35,2452.65 cw(c3400.82,2437.18) 3400.82,2459.06 ; v1(3389,2449) 3399.06,2459.06 U7.35@3542.76,2459.06 ; v1@3392.42,2445.58 cw(c3424.97,2413.03) 3424.97,2459.06 ; D2.1@3702.63,3216 D2.1@3714.63,3204
  Top Layer w15: R30.2@2710,3746.32 2710,3690 2725,3675 3132,3675 3172,3635 3172,3230 3234,3173 ; v1(3389,2674) 3262,2674 3234,2702 3234,3173 ; D2.1@3702.63,3216 3277,3216 3234,3173
  Bottom Layer w15: v1(3389,2449) v1(3389,2674)
ADC9: R14.1 U7.36 | length 645.6
  Top Layer w10: v1(3454,2674) 3482,2702 3482,2848 3504,2870 R14.1@3530.32,2870 ; v1@3454,2678.84 ccw(c3454,2690.53) 3462.27,2682.27 ccw(c3470.53,2674) v1@3458.84,2674 ; v1(3455,2434) 3460.37,2439.37 U7.36@3542.76,2439.37 ; v1@3458.42,2430.58 cw(c3479.66,2409.34) 3479.66,2439.37
  Bottom Layer w10: v1@3450.58,2670.58 cw(c3439.89,2659.89) 3455,2659.89 ; v1@3451.58,2437.42 ccw(c3443.31,2445.69) 3455,2445.69 ccw(c3466.69,2445.69) v1@3458.42,2437.42 ; v1(3454,2674) 3455,2673 v1(3455,2434)
BACKWARD_SW: J5.3 U7.34 | length 1432.5
  Top Layer w10: J5.3@2792.41,1884.61 3086.39,1884.61 3136,1835 v1(3161,1835) ; v1@3332,1838 3332,2461 3349.74,2478.74 U7.34@3542.76,2478.74 ; 3332,1849.11 ccw(c3347.11,1849.11) v1@3336.42,1838.42
  Bottom Layer w10: v1(3161,1835) v1(3333,1835) ; v1@3329.58,1831.58 ccw(c3321.31,1823.31) 3321.31,1835 ccw(c3321.31,1846.69) v1@3329.58,1838.42
BL_CTR: J8.23 U7.64 | length 1034.4
  Top Layer w10: v1@3536.58,1651.58 cw(c3528.31,1643.31) 3540,1643.31 cw(c3551.69,1643.31) v1@3543.42,1651.58 ; v1(3539,1757) 3540,1756 3841,1756 3859.68,1774.68 U7.64@3859.68,2102.76 ; J8.23@3540,1440 v1(3540,1655) ; v1@3542.42,1760.42 ccw(c3553.11,1771.11) 3553.11,1756
  Bottom Layer w10: v1@3535.58,1753.58 cw(c3524.89,1742.89) 3540,1742.89 ; v1@3536.58,1658.42 ccw(c3528.31,1666.69) 3540,1666.69 ccw(c3551.69,1666.69) v1@3543.42,1658.42 ; v1(3540,1655) v1@3540,1757
BOOT0: R22.1 R23.2 U7.94 | length 1057.9
  Top Layer w10: R22.1@3366,2242.32 v1(3392,2242.32) R23.2@3420,2242.32 ; v1@3388.58,2238.89 ccw(c3380.31,2230.62) 3380.31,2242.32 ccw(c3380.31,2254.01) v1@3388.58,2245.74 ; v1@3395.42,2238.89 cw(c3403.69,2230.62) 3403.69,2242.32 cw(c3403.69,2254.01) v1@3395.42,2245.74 ; v1@3647.58,2440.42 ccw(c3639.31,2448.69) 3651,2448.69 ccw(c3662.69,2448.69) v1@3654.42,2440.42 ; v1(3651,2437) 3651,2511 3669,2529 3724,2529 3734.89,2518.11 U7.94@4137.24,2518.11
  Bottom Layer w10: v1(3392,2242.32) 3392.32,2242 3456,2242 v1(3651,2437) ; v1@3395.42,2238.89 cw(c3402.93,2231.38) 3402.93,2242 ; v1@3395.42,2245.74 ccw(c3404.45,2254.77) 3404.45,2242 ; v1@3646.16,2437 cw(c3634.47,2437) 3642.73,2428.73 cw(c3651,2420.47) v1@3651,2432.16
BOOT1: R27.1 R28.2 U7.37 | length 190.8
  Top Layer w10: R27.1@3366,2389.68 R28.2@3420,2389.68 3465.5,2389.68 3495.5,2419.68 U7.37@3542.76,2419.68 U7.37@3541.58,2418.51
DB0: J8.6 U7.61 | length 1421.9
  Top Layer w10: v1(3780,1783) 3780,1950 3800.63,1970.63 U7.61@3800.63,2102.76 ; v1(3781,1566) 4374,1566 4392,1548 4392,1388 J8.6@4440,1340 ; v1@3784.42,1562.58 cw(c3792.69,1554.31) 3792.69,1566 cw(c3792.69,1577.69) v1@3784.42,1569.42
  Bottom Layer w10: v1@3780,1566 v1(3780,1783) ; 3780,1580.11 ccw(c3795.11,1580.11) v1@3784.42,1569.42
DB1: J8.7 U7.62 | length 1267.4
  Top Layer w10: v1@3802.58,1800.42 ccw(c3794.31,1808.69) 3806,1808.69 ccw(c3817.69,1808.69) v1@3809.42,1800.42 ; v1(3806,1540) 4325,1540 4340,1525 J8.7@4340,1440 ; v1(3806,1797) 3806,1926 3820.32,1940.32 U7.62@3820.32,2102.76 ; v1@3809.42,1536.58 cw(c3817.69,1528.31) 3817.69,1540 cw(c3817.69,1551.69) v1@3809.42,1543.42
  Bottom Layer w10: v1@3802.58,1543.42 ccw(c3794.31,1551.69) 3806,1551.69 ccw(c3817.69,1551.69) v1@3809.42,1543.42 ; v1@3802.58,1793.58 cw(c3794.31,1785.31) 3806,1785.31 cw(c3817.69,1785.31) v1@3809.42,1793.58 ; v1(3806,1540) v1(3806,1797)
DB2: J8.8 U7.81 | length 1661.3
  Top Layer w10: v1(3890,2352) 4000,2352 4089.8,2262.2 U7.81@4137.24,2262.2 ; v1@3893.42,2348.58 cw(c3901.69,2340.31) 3901.69,2352 cw(c3901.69,2363.69) v1@3893.42,2355.42
  Bottom Layer w10: v1@3886.58,2348.58 cw(c3878.31,2340.31) 3890,2340.31 cw(c3901.69,2340.31) v1@3893.42,2348.58 ; v1(3890,2352) 3890,2132 3918,2104 4160,2104 4289,1975 4289,1391 J8.8@4340,1340
DB3: J8.9 U7.82 | length 1579
  Top Layer w10: v1(3864,2380) 4002,2380 4100.11,2281.89 U7.82@4137.24,2281.89 ; v1@3867.42,2376.58 cw(c3875.69,2368.31) 3875.69,2380 cw(c3875.69,2391.69) v1@3867.42,2383.42
  Bottom Layer w10: v1@3860.58,2376.58 cw(c3852.31,2368.31) 3864,2368.31 cw(c3875.69,2368.31) v1@3867.42,2376.58 ; v1(3864,2380) 3864,2132.54 3910.54,2086 4137,2086 4240,1983 J8.9@4240,1440
DB4: J8.10 U7.38 | length 1673.9
  Top Layer w10: U7.38@3542.76,2400 v1@3836,2400 ; v1@3834.58,2396.58 ccw(c3826.31,2388.31) 3826.31,2400 ccw(c3826.31,2411.69) v1@3834.58,2403.42
  Bottom Layer w10: v1@3834.58,2396.58 cw(c3826.31,2388.31) 3838,2388.31 cw(c3849.69,2388.31) v1@3841.42,2396.58 ; v1@3838,2398 3838,2133.09 3903.09,2068 4107,2068 4190,1985 4190,1390 J8.10@4240,1340
  other v1: 3838,2400
DB5: J8.11 U7.39 | length 1473.5
  Top Layer w10: U7.39@3542.76,2380.32 v1@3814,2380.32
  Bottom Layer w10: v1@3808.58,2376.58 cw(c3800.31,2368.31) 3812,2368.31 cw(c3823.69,2368.31) v1@3815.42,2376.58 ; v1(3812,2380) 3812,2133.63 3895.63,2050 4080,2050 4140,1990 J8.11@4140,1440
DB6: J8.12 U7.40 | length 1435.4
  Top Layer w10: U7.40@3542.76,2360.63 v1(3788,2360)
  Bottom Layer w10: v1@3784.58,2356.58 cw(c3776.31,2348.31) 3788,2348.31 cw(c3799.69,2348.31) v1@3791.42,2356.58 ; v1(3788,2360) 3788,2132.18 4090,1830.18 4090,1628 ; 4090,1634 4090,1628 ; J8.12@4140,1340 4090,1390 4090,1628
DB7: J8.13 U7.41 | length 1269.6
  Top Layer w10: U7.41@3542.76,2340.94 v1@3768,2340.94 ; 3750.03,2340.94 cw(c3750.03,2326.03) v1@3760.58,2336.58
  Bottom Layer w10: v1@3760.58,2336.58 cw(c3752.31,2328.31) 3764,2328.31 cw(c3775.69,2328.31) v1@3767.42,2336.58 ; v1(3764,2340) 3764,2114 4040,1838 J8.13@4040,1440
DB8: J8.14 U7.42 | length 1320.7
  Top Layer w10: U7.42@3542.76,2321.26 v1@3740,2321.26
  Bottom Layer w10: v1@3736.58,2316.58 cw(c3728.31,2308.31) 3740,2308.31 cw(c3751.69,2308.31) v1@3743.42,2316.58 ; v1@3740,2318 3740,2091 3990,1841 3990,1390 J8.14@4040,1340 ; v1(3740,2320) v1@3742,2318
DB9: J8.15 U7.43 | length 1162
  Top Layer w10: U7.43@3542.76,2301.57 v1@3719.57,2301.57
  Bottom Layer w10: v1@3712.58,2298.58 cw(c3704.31,2290.31) 3716,2290.31 cw(c3727.69,2290.31) v1@3719.42,2298.58 ; v1(3716,2302) 3716,2080 3940,1856 J8.15@3940,1440 J8.15@3940,1452
DB10: J8.16 U7.44 | length 1217.2
  Top Layer w10: U7.44@3542.76,2281.89 v1@3690,2281.89
  Bottom Layer w10: v1@3686.58,2278.58 cw(c3678.31,2270.31) 3690,2270.31 cw(c3701.69,2270.31) v1@3693.42,2278.58 ; v1(3690,2282) 3690,2064 3890,1864 3890,1456 ; 3890,1462 3890,1456 ; J8.16@3940,1340 3890,1390 3890,1456
DB11: J8.17 U7.45 | length 1180.8
  Top Layer w10: U7.45@3542.76,2262.2 v1@3664,2262.2
  Bottom Layer w10: v1@3660.58,2258.58 cw(c3652.31,2250.31) 3664,2250.31 cw(c3675.69,2250.31) v1@3667.42,2258.58 ; v1(3664,2262) 3664,2067 3596,1999 3596,1566 3615,1547 3748,1547 3840,1455 J8.17@3840,1440 J8.17@3840,1452
DB12: J8.18 U7.46 | length 1245.6
  Top Layer w10: U7.46@3542.76,2242.52 v1@3637.52,2242.52
  Bottom Layer w10: v1@3634.58,2238.58 cw(c3626.31,2230.31) 3638,2230.31 cw(c3649.69,2230.31) v1@3641.42,2238.58 ; v1(3638,2242) 3638,2077 3564,2003 3564,1550 3589,1525 3735,1525 3790,1470 3790,1390 J8.18@3840,1340
DB13: J8.19 U7.55 | length 828.1
  Top Layer w10: v1@3619.58,1785.42 ccw(c3611.31,1793.69) 3623,1793.69 ccw(c3634.69,1793.69) v1@3626.42,1785.42 ; v1@3622,1628 3659,1628 3740,1547 J8.19@3740,1440 ; v1(3623,1782) 3623,2006.82 3682.52,2066.34 U7.55@3682.52,2102.76 ; v1@3625.42,1623.58 cw(c3636.11,1612.89) 3636.11,1628
  Bottom Layer w10: v1@3618.58,1630.42 ccw(c3607.89,1641.11) 3623,1641.11 ; v1@3619.58,1778.58 cw(c3611.31,1770.31) 3623,1770.31 cw(c3634.69,1770.31) v1@3626.42,1778.58 ; v1@3623,1628 v1(3623,1782) ; J8.19@3740,1440 J8.19@3746.84,1446.84
  other v1: 3622,1627
DB14: J8.20 U7.56 | length 891.1
  Top Layer w10: v1@3643.58,1801.42 ccw(c3635.31,1809.69) 3647,1809.69 ccw(c3658.69,1809.69) v1@3650.42,1801.42 ; v1@3644.58,1599.58 cw(c3636.31,1591.31) 3648,1591.31 cw(c3659.69,1591.31) v1@3651.42,1599.58 ; v1(3647,1798) 3647,2001 3702.2,2056.2 U7.56@3702.2,2102.76 ; v1(3648,1603) 3648,1560 3690,1518 3690,1390 J8.20@3740,1340
  Bottom Layer w10: v1@3643.58,1794.58 cw(c3635.31,1786.31) 3647,1786.31 cw(c3658.69,1786.31) v1@3650.42,1794.58 ; 3647,1617.11 ccw(c3662.11,1617.11) v1@3651.42,1606.42 ; v1(3647,1798) 3647,1604 v1(3648,1603)
DB15: J8.21 U7.57 | length 885.3
  Top Layer w10: J8.21@3640,1440 3582,1498 3582,1632 3601,1651 v1(3671,1651) ; v1@3667.58,1647.58 ccw(c3659.31,1639.31) 3659.31,1651 ccw(c3659.31,1662.69) v1@3667.58,1654.42 ; v1@3668.58,1786.42 ccw(c3660.31,1794.69) 3672,1794.69 ccw(c3683.69,1794.69) v1@3675.42,1786.42 ; v1(3672,1783) 3672,1993 3721.89,2042.89 U7.57@3721.89,2102.76
  Bottom Layer w10: J8.21@3650,1440 J8.21@3640,1440 J8.21@3664,1440 ; v1@3667.58,1654.42 ccw(c3656.89,1665.11) 3672,1665.11 ; v1@3668.58,1779.58 cw(c3660.31,1771.31) 3672,1771.31 cw(c3683.69,1771.31) v1@3675.42,1779.58 ; v1@3672,1652 v1(3672,1783)
ENCODER_A: J6.2 U7.92 | length 1457.4
  Top Layer w10: J6.2@2792.41,2395.39 v1(3148.39,2395.39) ; v1@3144.97,2391.97 ccw(c3136.7,2383.7) 3136.7,2395.39 ccw(c3136.7,2407.08) v1@3144.97,2398.82 ; v1(3717,2472) 3723.74,2478.74 U7.92@4137.24,2478.74 ; v1@3720.42,2468.58 cw(c3744.96,2444.04) 3744.96,2478.74
  Bottom Layer w10: v1(3148.39,2395.39) 3149.79,2394 3560,2394 3638,2472 v1(3717,2472) ; v1@3151.82,2398.82 ccw(c3163.45,2410.45) 3163.45,2394 ; v1@3713.58,2468.58 ccw(c3705.31,2460.31) 3705.31,2472 ccw(c3705.31,2483.69) v1@3713.58,2475.42
ENCODER_B: J6.3 U7.93 | length 1466.8
  Top Layer w10: J6.3@2792.41,2444.61 v1(3150.39,2444.61) ; v1@3146.97,2441.18 ccw(c3138.7,2432.92) 3138.7,2444.61 ccw(c3138.7,2456.3) v1@3146.97,2448.03 ; v1(3700.43,2498.43) U7.93@4137.24,2498.43 ; v1@3703.85,2495 cw(c3712.12,2486.73) 3712.12,2498.43 cw(c3712.12,2510.12) v1@3703.85,2501.85
  Bottom Layer w10: v1@3150.39,2439.76 cw(c3150.39,2428.07) 3158.66,2436.34 cw(c3166.93,2444.61) v1@3155.24,2444.61 ; v1(3150.39,2444.61) 3182,2413 3553,2413 3638.43,2498.43 v1(3700.43,2498.43) ; v1@3697,2495 ccw(c3688.73,2486.73) 3688.73,2498.43 ccw(c3688.73,2510.12) v1@3697,2501.85
FLASH_CS: J8.32 U7.67 | length 1494.2
  Top Layer w10: J8.32@3140,1340 3191,1391 3191,1668 3206.84,1683.84 3904.84,1683.84 3918.74,1697.74 U7.67@3918.74,2102.76
FORWARD_SW: J5.1 U7.33 | length 1461.6
  Top Layer w10: J5.1@2792.41,1786.18 3111.18,1786.18 3135,1810 v1(3160,1810) ; v1@3296.58,1813.42 ccw(c3285.89,1824.11) 3301,1824.11 ; v1@3301,1809 3301,2469 3330.43,2498.43 U7.33@3542.76,2498.43
  Bottom Layer w10: v1(3160,1810) v1(3300,1810) ; v1@3296.58,1806.58 ccw(c3288.31,1798.31) 3288.31,1810 ccw(c3288.31,1821.69) v1@3296.58,1813.42
GND: C1.1 C2.1 C3.1 C4.1 C5.1 C10.1 C11.1 C12.1 C13.1 C14.1 C15.1 C16.1 C18.1 C19.1 C21.1 C22.1 C23.2 C24.1 C25.1 C26.1 C27.1 C28.1 C29.1 C30.1 C31.1 C32.1 C33.2 C34.2 C35.1 C36.1 C37.1 C38.1 C39.2 C40.1 C41.1 D3.3 D4.2 D5.2 J1.2 J1.3 J2.2 J2.3 J2.4 J3.5 J3.6 J3.7 J3.8 J3.9 J4.2 J5.2 J5.4 J5.5 J5.6 J6.4 J6.5 J6.6 J7.2 J7.4 J7.5 J8.26 J8.35 J8.36 P1.2 P1.38 P1.40 P1.42 P1.44 pad.0 pad.1 pad.2 pad.3 R4.1 R5.2 R6.2 R7.1 R8.1 R13.2 R23.1 R28.1 U1.2 U2.4 U2.9 U3.4 U3.9 U4.2 U5.15 U6.2 U6.25 U7.10 U7.20 U7.27 U7.74 | length 5362.6
  Top Layer w10: C27.1@3320.32,2616 v1(3320.32,2642.32) 3328,2650 v1(3427,2650) 3460.46,2616.54 U7.27@3542.76,2616.54 ; v1@3323.74,2638.89 cw(c3350.56,2612.07) 3350.56,2650 ; U5.15@3347.36,3037 3398,3037 3410,3049 3410,3162 v1(3400,3172) C23.2@3367.68,3172 ; C38.1@3368,2056.32 C26.1@3422,2056.32 ; v1@3386.58,3033.58 ccw(c3378.31,3025.31) 3378.31,3037 ccw(c3378.31,3048.69) v1@3386.58,3040.42 ; v1@3396.58,3168.58 cw(c3364.17,3136.17) 3410,3136.17 ; v1@3403.65,3175.65 cw(c3388.31,3160.31) 3410,3160.31 ; v1@3423.58,2646.58 ccw(c3415.31,2638.31) 3415.31,2650 ccw(c3415.31,2661.69) v1@3423.58,2653.42 ; v1@3427,2645.16 cw(c3427,2633.47) 3435.27,2641.73 cw(c3443.53,2650) v1@3431.84,2650 ; C30.1@3588.32,2796 3588.32,2810.01 v1(3610.3,2832) ; R13.2@3635,3054 v1(3638.32,3054) ; v1@3670.32,2840.84 cw(c3670.32,2829.15) 3678.58,2837.42 cw(c3686.85,2845.68) v1@3675.16,2845.68 ; v1(3670.32,2900.32) C28.1@3670.32,2870 v1(3670.32,2845.68) 3702.2,2813.8 U7.20@3702.2,2697.24 ; C31.1@3846,3400.32 3885.69,3360.63 C11.1@3918,3360.63 ; v1(3887.32,3077) C33.2@3910.32,3054 ; C32.1@3888,2839.68 v1(3888,2867) ; 3899.06,2644.97 ccw(c3913.97,2644.97) v1@3903.42,2634.42 ; U7.10@3899.06,2697.24 3899.06,2631.78 3899.83,2631 v1(3900,2631) ; C35.1@3994,2841.68 v1(4021.68,2841.68) ; v1(4031,3054) C34.2@4064.32,3054 ; U6.2@4047.25,4075.63 v1(4096.46,4075.63) ; U7.74@4056.54,2102.76 4056.54,1946.46 4083,1920 4103,1920 C24.1@4148,1920 ; U6.25@4093.04,4072.21 ccw(c4084.77,4063.94) 4084.77,4075.63 ccw(c4084.77,4087.32) U6.25@4093.04,4079.05 ; v1@4101.42,1916.58 cw(c4109.69,1908.31) 4109.69,1920 cw(c4109.69,1931.69) v1@4101.42,1923.42 ; C36.1@4333.69,2636 4345,2647.32 C25.1@4345,2685.32
  Top Layer w20: v1(2604,3847) R4.1@2644.32,3847 ; 2698.82,1933.82 J5.4@2792.41,1933.82 v1(2838.82,1933.82) ; 2704.39,1835.39 J5.2@2792.41,1835.39 J5.2@2791.8,1836 ; 2722.82,2493.82 J6.4@2792.41,2493.82 v1(2835.82,2493.82) ; 2725.39,2955.39 J7.2@2792.41,2955.39 v1@2844.39,2955.39 ; C18.1@3014,3077.68 v1(3014,3106) ; v1(3016,2756) C19.1@3016,2782.32 ; C40.1@3360.63,1636 3360.63,1607.69 C41.1@3400.32,1568 ; C2.1@3408.88,3774 3410,3775.12 v1(3410,3842) ; R23.1@3420,2281.68 R28.1@3420,2350.32 ; C26.1@3422,2056.32 3423.68,2056.32 3471.37,2008.63 C29.1@3490,2008.63 ; v1(3918.32,3848.32) C22.1@3918.32,3875 ; C21.1@3918.32,3970 C16.1@3918.32,4010 ; R8.1@3957.68,3654 3998,3654 4010.32,3666.32 R6.2@4080,3666.32 ; C4.1@3957.68,3804 v1(4004,3804) ; R7.1@4019.68,4478 4065,4478 4075.32,4488.31 R5.2@4132,4488.31 ; C3.1@4019.68,4630 v1(4051,4630) ; v1@4040,3293 U1.2@4040,3349.88 ; C5.1@4244,3311 C5.1@4244.37,3311 v1@4285,3311 ; D4.2@4656,1702 D5.2@4656,1768 ; U4.2@4662,4149.12 J3.8@4662,4341.69 ; C37.1@4899.69,3852 4935,3852 4962,3825 P1.2@4962,3722 ; P1.44@4962,1622 P1.42@4962,1722 P1.40@4962,1822 P1.38@4962,1922
  Top Layer w25: 2646.74,1606.74 v1(2646.74,1678.9) 2784.9,1678.9 ; J7.4@2647.17,3111.53 v1(2647.17,3318.9) ; 2725.39,3475.39 J2.2@2792.83,3475.39 v1(2836,3475.39) v1(2861,3475.39) v1(2887.61,3475.39) ; 2777.9,2798.9 v1(2646.74,2798.9) v1(2646.74,2601.1) 2802.9,2601.1 ; 2781.9,2041.1 v1(2646.74,2041.1) v1(2646.74,2238.9) 2809.9,2238.9 ; v1(3432,4600) C1.1@3492.88,4600
  other v1: 3328,1558 5069,1562 3376.02,1592.3 2943,1620 3309,1635 4763,1675 2889,1717 3000,1718 4656,1735 5074,1770 3482,1774 3353,1775 3416,1775 4630,1845 3417,1848 3482,1849 4517,1849 4405,1850 4760,1877 4406,1919 4517,1919 4098,1920 4630,1920 4118,1921 3369,1924 3416,1924 5073,1962 2876,2023 3024,2026 3446,2035 3395,2056.32 3558,2071 2646.74,2137 3020,2145 2877,2146 5071,2163 4470,2168 4527,2168 4589,2168 4650,2188 4693,2232 2877,2281 3020,2283 3460,2318 3420,2319 5073,2365 3014,2520 2892,2554 5069,2571 4345,2661 3018,2678 2646.74,2696 2892,2703 4774,2709 4730,2752 5072,2774 2893,2845 2844,2955 5074,2968 4279,3007 4179,3009 3390,3037 3606,3054 2889,3083 3723,3105 3786,3105 3847,3105 2646.74,3111.1 4277,3126 4180,3127 3040,3165 3872,3171 5074,3175 2647.17,3214 2757,3217 2888,3217 4180,3228 4279,3229 3872,3239 3041,3271 3263,3282 4018,3296 3850,3297 4040,3297 3874,3298 4286,3311 3849,3322 3873,3322 5075,3373 3041,3398 4766,3469 4628,3471 4498,3472 4195.69,3492 3042,3508 5078,3571 2762,3579 2883,3580 2647.17,3581.1 3044,3617 3690,3651 3768,3651 3729,3652 3988,3654 4052,3666.32 3767,3728 3688,3729 4156,3742 2885,3754 4760,3762 5077,3784 3691,3795 3727,3796 3767,3796 4095,3820 3410,3821 4220,3821 2884,3852 4761,3899 3685,3953 3372,3954 3581,3954 3788,3954 3264,3955 3480,3955 4817,3976 4947,3976 5079,3977 3918.32,3989 4155,4017 4096,4018 4125.99,4046.1 2647,4068 4155,4077 5073,4188 2646,4204 4953,4255 3691,4259 4207,4297 4405,4314 4377,4315 3691,4324 2647,4334 5074,4334 4377,4348 4405,4348 3692,4392 4207,4398 2962,4433 4044,4478 3762,4485 3837,4485 3800,4486 4104,4488.31 2961,4501 3355,4502 4207,4505 3762,4553 3839,4554 2961,4560 3356,4570 3454,4600 4209,4612 3763,4621 3801,4621 3840,4621 3356,4641 3764,4684 3802,4684 3841,4685
  other v2: 3728,3728 3801,4553
LCD_CS: J8.1 U7.58 | length 1684.5
  Top Layer w10: v1@3696.58,1800.42 ccw(c3688.31,1808.69) 3700,1808.69 ccw(c3711.69,1808.69) v1@3703.42,1800.42 ; v1(3699,1658) 4623,1658 4640,1641 J8.1@4640,1440 ; v1(3700,1797) 3700,1986 3741.57,2027.57 U7.58@3741.57,2102.76 ; v1@3702.42,1654.58 cw(c3710.69,1646.31) 3710.69,1658 cw(c3710.69,1669.69) v1@3702.42,1661.42
  Bottom Layer w10: v1@3695.6,1661.45 ccw(c3687.39,1669.77) 3699.08,1669.69 ccw(c3710.77,1669.61) v1@3702.45,1661.4 ; v1@3696.55,1793.6 cw(c3688.23,1785.39) 3699.92,1785.31 cw(c3711.61,1785.23) v1@3703.4,1793.55 ; v1(3699,1658) v1(3700,1797)
LCD_RD: J8.4 U7.63 | length 1503.4
  Top Layer w10: v1@3831.58,1787.42 ccw(c3823.31,1795.69) 3835,1795.69 ccw(c3846.69,1795.69) v1@3838.42,1787.42 ; v1(3835,1591) 4472,1591 4492,1571 4492,1388 J8.4@4540,1340 ; v1(3835,1784) 3835,1918 3840,1923 U7.63@3840,2102.76 ; v1@3838.42,1587.58 cw(c3846.69,1579.31) 3846.69,1591 cw(c3846.69,1602.69) v1@3838.42,1594.42
  Bottom Layer w10: v1@3831.58,1594.42 ccw(c3823.31,1602.69) 3835,1602.69 ccw(c3846.69,1602.69) v1@3838.42,1594.42 ; v1@3831.58,1780.58 cw(c3823.31,1772.31) 3835,1772.31 cw(c3846.69,1772.31) v1@3838.42,1780.58 ; v1(3835,1591) v1(3835,1784)
LCD_RS: J8.2 U7.59 | length 1697.9
  Top Layer w10: v1@3724.58,1787.42 ccw(c3716.31,1795.69) 3728,1795.69 ccw(c3739.69,1795.69) v1@3731.42,1787.42 ; v1(3728,1638) 4562,1638 4590,1610 4590,1390 J8.2@4640,1340 ; v1(3728,1784) 3728,1982 3761.26,2015.26 U7.59@3761.26,2102.76
  Bottom Layer w10: v1@3724.58,1641.42 ccw(c3716.31,1649.69) 3728,1649.69 ccw(c3739.69,1649.69) v1@3731.42,1641.42 ; v1@3724.58,1780.58 cw(c3716.31,1772.31) 3728,1772.31 cw(c3739.69,1772.31) v1@3731.42,1780.58 ; v1(3728,1638) v1(3728,1784)
LCD_RST: J8.5 U7.77 | length 1009.5
  Top Layer w10: U7.77@4137.24,2183.46 4314.54,2183.46 4334,2164 v1(4334,2050) ; v1@4330.58,2053.42 ccw(c4322.31,2061.69) 4334,2061.69 ccw(c4345.69,2061.69) v1@4337.42,2053.42
  Bottom Layer w10: v1@4330.58,2046.58 cw(c4322.31,2038.31) 4334,2038.31 cw(c4345.69,2038.31) v1@4337.42,2046.58 ; v1(4334,2050) 4334,1546 J8.5@4440,1440
LCD_WR: J8.3 U7.60 | length 1485
  Top Layer w10: v1(3754.5,1781.65) 3754.2,1796.65 3754,1796.85 3754,1966 3780.94,1992.94 U7.60@3780.94,2102.76 ; v1(3755,1615) 4526,1615 4540,1601 J8.3@4540,1440 ; v1@3758.42,1611.58 cw(c3766.69,1603.31) 3766.69,1615 cw(c3766.69,1626.69) v1@3758.42,1618.42
  Bottom Layer w10: v1@3751.58,1618.42 ccw(c3744.52,1625.48) 3754.5,1625.48 ; v1@3754.5,1617.5 v1(3754.5,1781.65) ; 3754.5,1627.9 ccw(c3767.9,1627.9) v1@3758.42,1618.42
LED0: R25.1 U7.70 | length 898.9
  Top Layer w10: U7.70@3977.8,2102.76 3977.8,1722.2 3999,1701 R25.1@4487.31,1701
LED1: R26.1 U7.71 | length 804.8
  Top Layer w10: U7.71@3997.48,2102.76 3997.48,1796.52 4021,1773 R26.1@4486.31,1773
NetC3_2: C3.2 U2.8 | length 63.9
  Top Layer w15: U2.8@3915.24,4628.78 C3.2@3979.1,4628.78
NetC4_2: C4.2 U3.8 | length 75.9
  Top Layer w15: U3.8@3842.24,3803.78 C4.2@3918.1,3803.78
NetC5_2: C5.2 L1.2 U1.1 U1.3 | length 358.6
  Top Layer w20: U1.1@4002.6,3349.88 4002.6,3386.6 4016,3400 4154.63,3400 L1.2@4165.63,3411 C5.2@4165.63,3311 ; U1.3@4077.4,3349.88 4077.4,3398.6
NetC6_1: C6.1 R5.1 | length 114.6
  Top Layer w15: C6.1@4019.68,4528 R5.1@4134.31,4528
NetC6_2: C6.2 U2.6 | length 64.3
  Top Layer w15: U2.6@3915.24,4528.78 C6.2@3979.53,4528.78
NetC7_1: C7.1 R6.1 | length 120.6
  Top Layer w15: C7.1@3957.68,3704 R6.1@4078.32,3704
NetC7_2: C7.2 U3.6 | length 75.9
  Top Layer w15: U3.6@3842.24,3703.78 C7.2@3918.1,3703.78
NetC8_1: C8.1 U2.1 | length 94.3
  Top Layer w10: C8.1@3609.68,4670 3645.68,4670 U2.1@3686.9,4628.78
NetC8_2: C8.2 L2.1 U2.3 | length 416.8
  Top Layer w10: 3457,4533 3452,4538 3413,4538 3403,4548 3403,4663 3410,4670 C8.2@3570.32,4670 ; 3548,4493 3549,4494
  Top Layer w28: 3616.99,4528.78 U2.3@3686.9,4528.78
NetC9_1: C9.1 U3.1 | length 102.5
  Top Layer w10: C9.1@3529.68,3848 3569.68,3848 U3.1@3613.9,3803.78
NetC9_2: C9.2 L3.1 U3.3 | length 410.9
  Top Layer w10: 3328,3712 3326,3714 3326,3839 3352,3865 3473.32,3865 C9.2@3490.32,3848 ; 3461,3676 3466,3681
  Top Layer w28: 3520,3703.78 U3.3@3613.9,3703.78
NetC10_2: C10.2 U1.4 | length 103.3
  Top Layer w25: U1.4@4077.4,3460.12 4077.4,3485.4 4085,3493 C10.2@4152.31,3493
NetC16_2: C16.2 C21.2 R20.2 U6.5 U6.6 | length 132.5
  Top Layer w10: C21.2@3957.68,3970 4041,3970 4047.25,3976.25 U6.6@4047.25,3996.89 U6.5@4047.25,4016.57
NetC17_1: C17.1 U5.1 | length 95.3
  Top Layer w10: C17.1@3112.32,3176 3125,3163.32 3125,3089.64 U5.1@3127.64,3087
NetC17_2: C17.2 U5.3 | length 287.5
  Top Layer w10: U5.3@3127.64,2987 3184,2987 3198,3001 3198,3159 3181,3176 C17.2@3151.68,3176
NetC18_2: C18.2 U5.2 | length 112.3
  Top Layer w10: C18.2@3014,3038.32 U5.2@3126.32,3038.32
NetC19_2: C19.2 U5.6 | length 118
  Top Layer w10: C19.2@3016,2821.68 3031.32,2837 U5.6@3127.64,2837
NetC20_1: C20.1 U5.4 | length 116.1
  Top Layer w10: C20.1@3016,2947.68 3040.32,2947.68 3051,2937 U5.4@3127.64,2937
NetC20_2: C20.2 U5.5 | length 120.5
  Top Layer w10: C20.2@3016,2908.32 3037.32,2887 U5.5@3127.64,2887
NetC33_1: C33.1 R29.2 X1.1 | length 125.5
  Top Layer w10: R29.2@3950.66,3000.98 X1.1@3950.66,3126.5
NetC38_2: C38.2 U7.49 | length 238.2
  Top Layer w10: C38.2@3368,2095.68 3368,2142 3384,2158 3461,2158 3486.46,2183.46 U7.49@3542.76,2183.46
NetC39_1: C39.1 U7.73 | length 183
  Top Layer w10: C39.1@4036.32,1920 4036.85,1920.54 U7.73@4036.85,2102.76
NetD1_1: D1.1 J1.1 | length 184.7
  Top Layer w59.06: J1.1@3119.09,4190 3229.32,4190 D1.1@3282,4137.32
NetD3_1: D3.1 R12.2 R13.1 | length 388.6
  Top Layer w15: D3.1@3502.6,2935.79 3502.6,3065.52 3526.08,3089 3659,3089 3677.68,3070.32 R13.1@3677.68,3054 R12.2@3677.68,3004
NetD4_1: D4.1 R25.2 | length 70.3
  Top Layer w10: R25.2@4526.69,1701 D4.1@4597,1701
NetD5_1: D5.1 R26.2 | length 65.3
  Top Layer w10: R26.2@4525.69,1773 D5.1@4591,1773
NetJ3_2: J3.2 R15.1 U4.3 | length 1100.7
  Top Layer w15: v1@3886,4193 3886,4080 3900,4066 R15.1@3916.32,4066 ; v1(3949,4198) 4489,4198 v1(4508.9,4217.9) 4531.5,4240.5 J3.2@4531.5,4350.94 ; U4.3@4623.9,4149.81 v1(4623.9,4217.9)
  Bottom Layer w15: v1(3891,4198) v1(3949,4198) ; v1(4508.9,4217.9) v1(4623.9,4217.9)
NetJ3_3: J3.3 R16.1 U4.1 | length 1092.1
  Top Layer w15: R16.1@3916.32,4116 3916.32,4213.31 3930,4227 4460,4227 v1(4479.24,4246.24) 4500,4267 J3.3@4500,4350.94 ; U4.1@4698,4150.52 v1(4698,4192)
  Bottom Layer w15: v1(4479.24,4246.24) 4681.76,4246.24 4698,4230 v1(4698,4192)
NetR1_1: R1.1 U2.7 | length 63.9
  Top Layer w15: U2.7@3915.24,4578.78 R1.1@3979.1,4578.78
NetR2_1: R2.1 U3.7 | length 75.9
  Top Layer w15: U3.7@3842.24,3753.78 R2.1@3918.1,3753.78
NetR3_1: R3.1 R4.2 R30.1 | length 120.6
  Top Layer w20: 2688,3847 R3.1@2748.32,3847 ; R30.1@2710,3785.68 2710,3846
NetR7_2: R7.2 R9.1 U2.5 | length 114.3
  Top Layer w15: U2.5@3915.24,4478.78 R7.2@3977.53,4478.78 ; R9.1@3980.32,4426 R7.2@3980.32,4478
NetR8_2: R8.2 R10.1 U3.5 | length 127.9
  Top Layer w15: U3.5@3842.24,3653.78 R8.2@3918.1,3653.78 ; R10.1@3918.32,3602 R8.2@3918.32,3654